# Altium PCB Lab11.PcbDoc
Units mil, origin at the board's own origin, x right, y up, seen from the top; angles counter-clockwise.
Board outline 15019.69 x 12106.3 mil, 2 copper layers (Top Layer, Top, Bottom Layer, Bottom); 28 components, 19 nets, 56 pads, 0 vias.
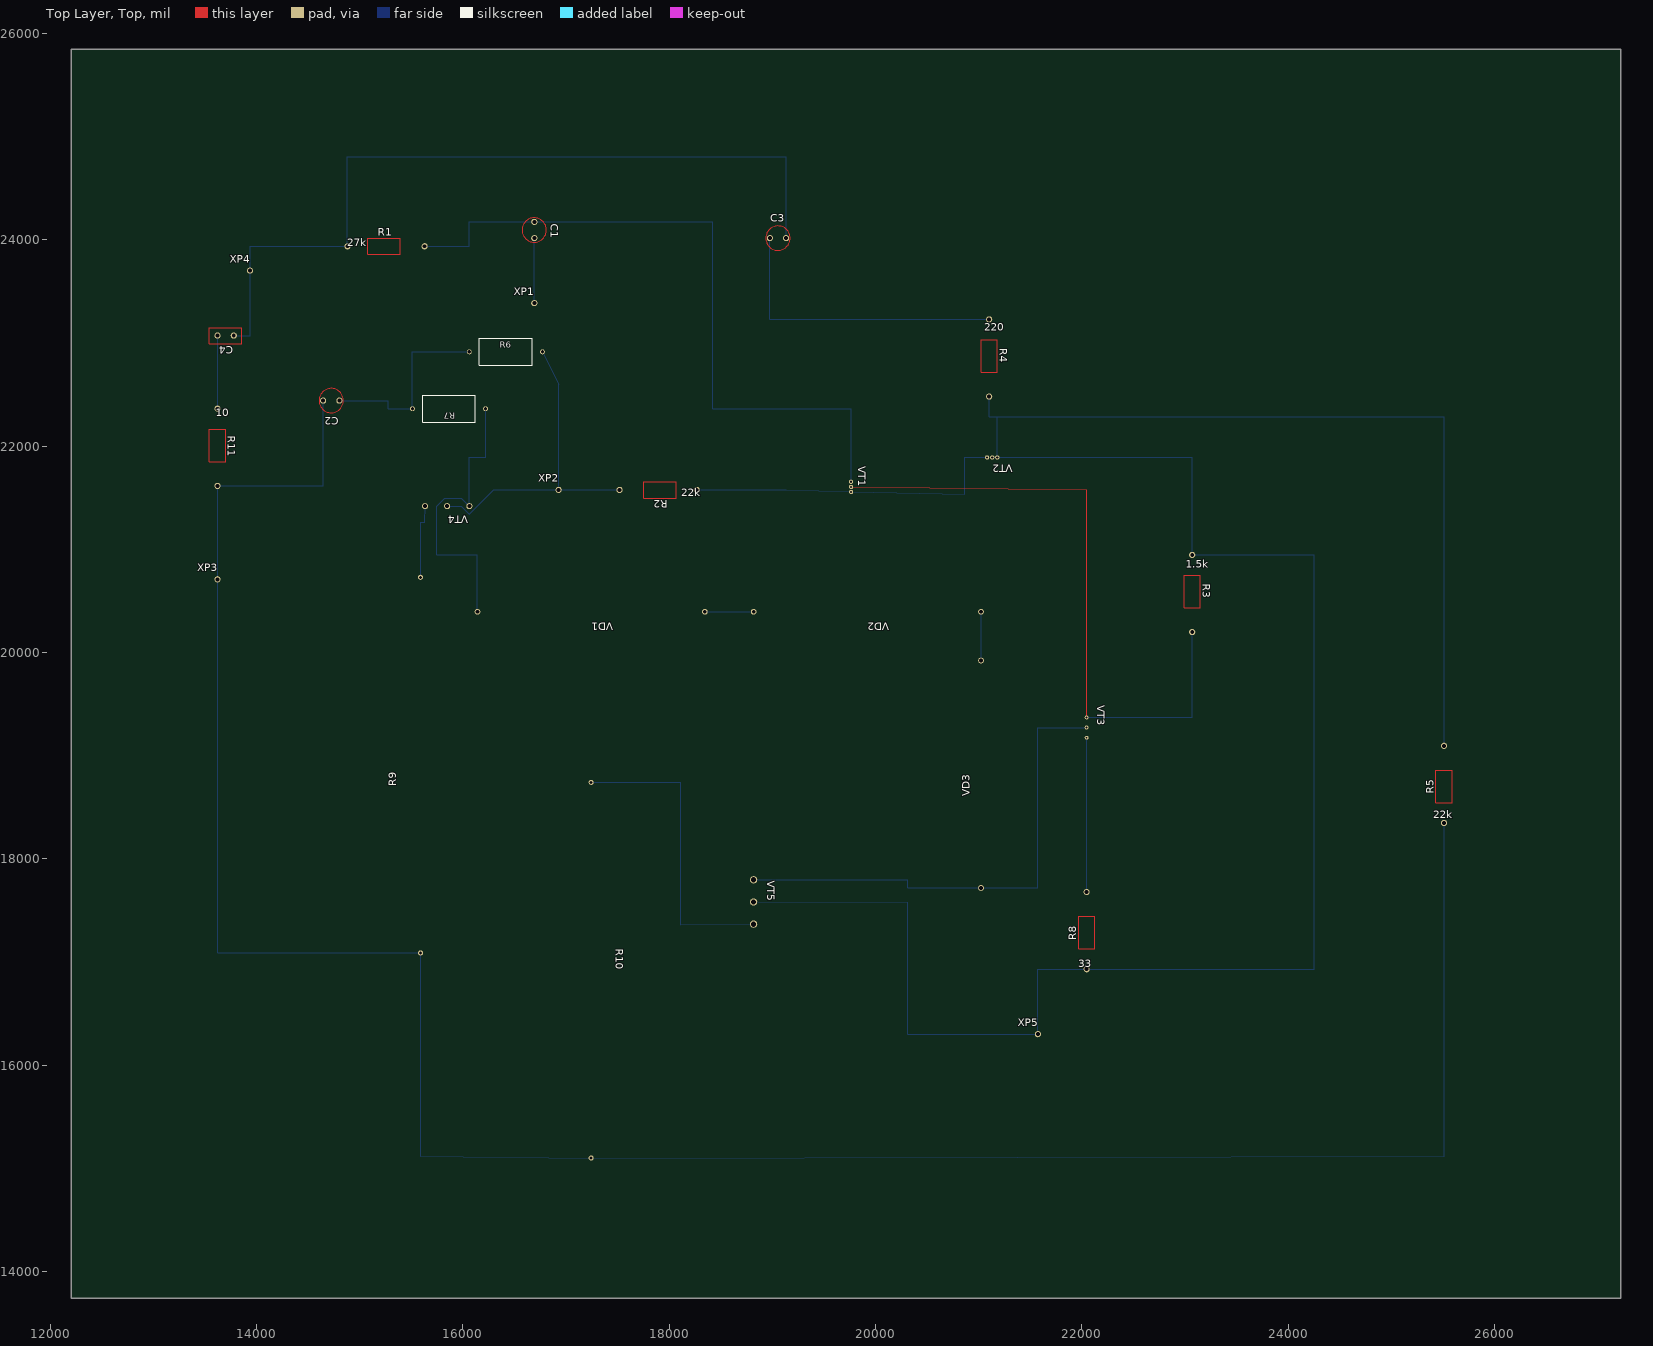
[diagram p0: Top Layer, Top view]
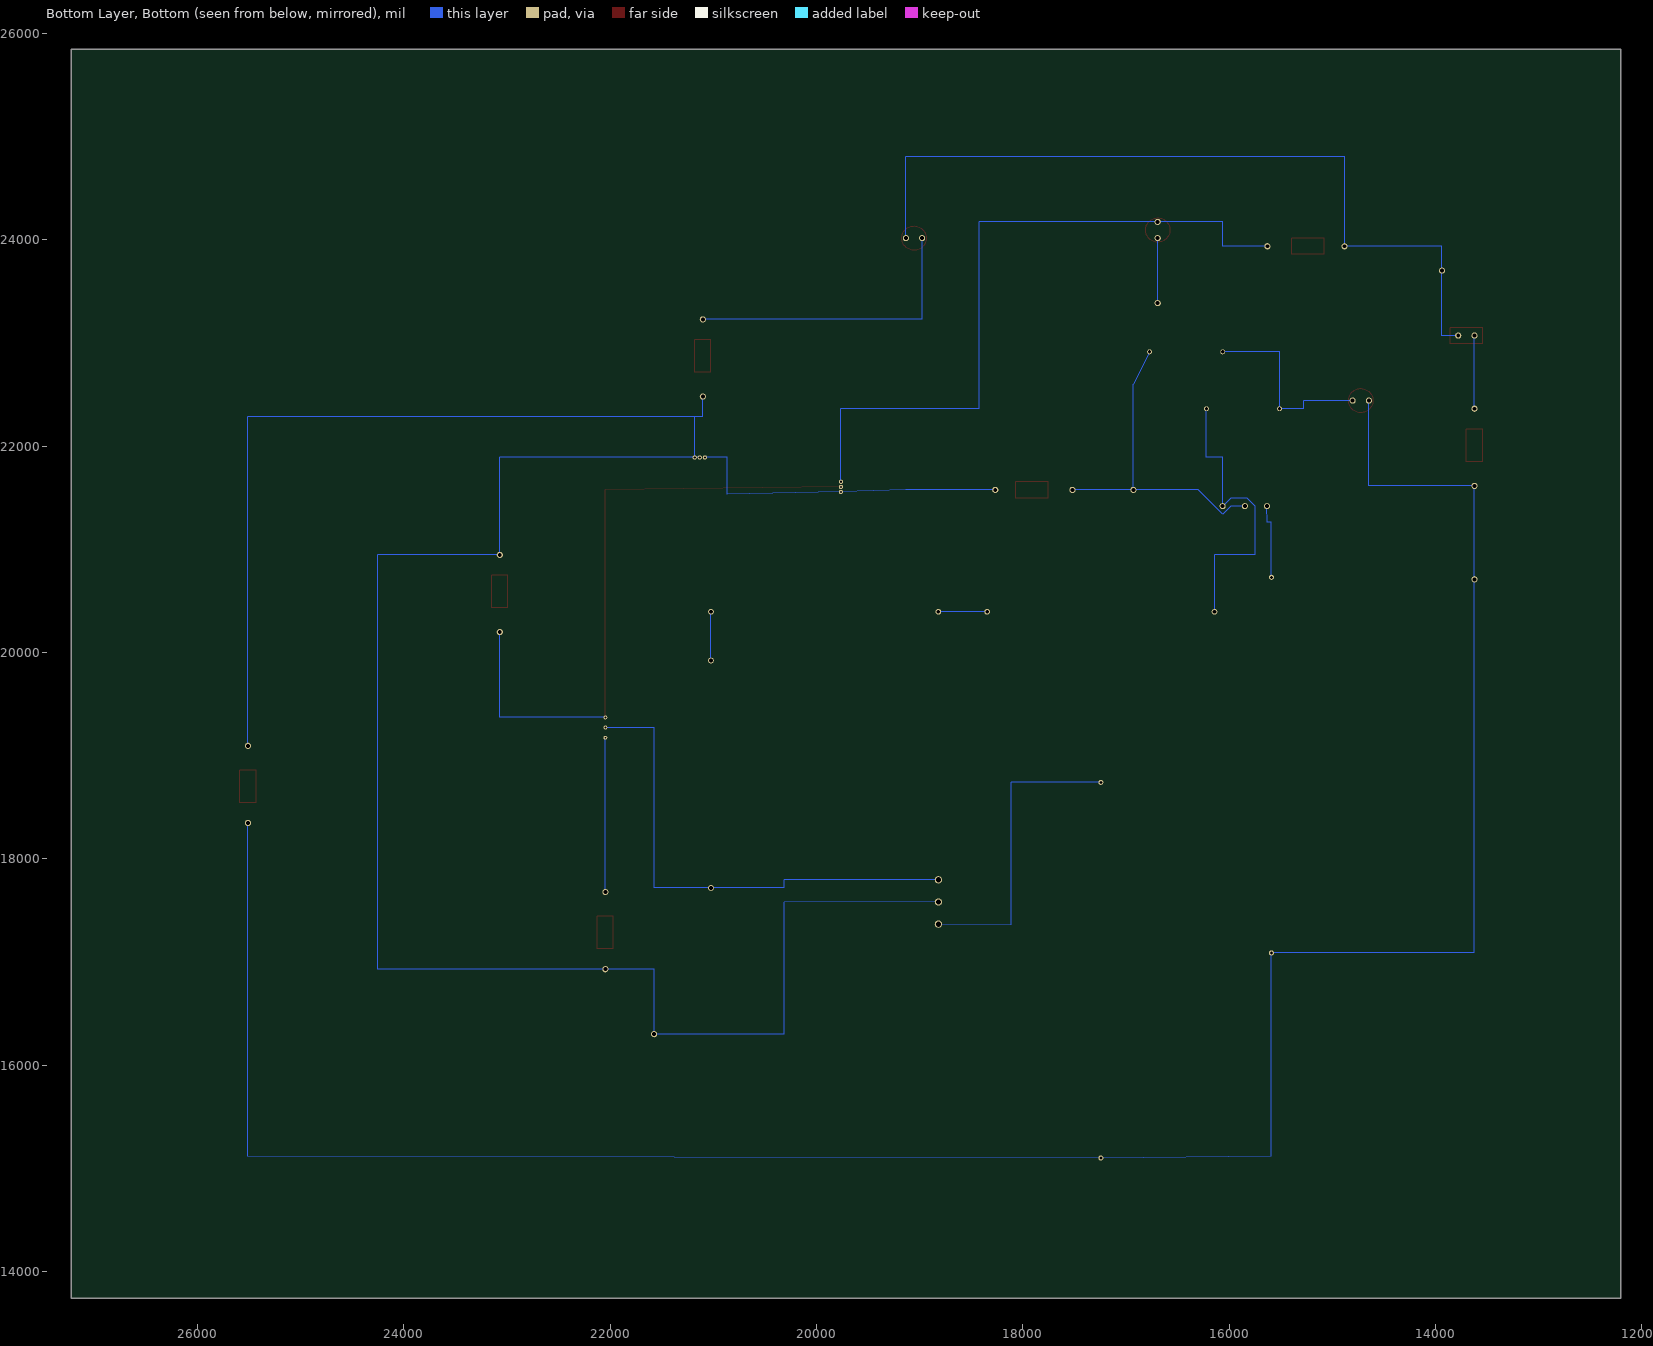
[diagram p1: Bottom Layer, Bottom view, seen from below]

## Layer stack, top to bottom
Top Solder, Top Mask: solder mask 0.4, Solder Resist, Dk 3.5
Top Layer, Top: signal copper 1.4
Dielectric 1: dielectric 12.6, FR-4, Dk 4.8
Bottom Layer, Bottom: signal copper 1.4
Bottom Solder, Bot Mask: solder mask 0.4, Solder Resist, Dk 3.5

## Board outline
12204.72,13740.16 27224.41,13740.16 27224.41,25846.46 12204.72,25846.46

## Design rules (kind name [scope] priority, off if disabled: settings)
Clearance [All] p1: gap=10 ignorepadtopadclearanceinfootprint=FALSE except(0: Arc-Hole Track-Hole SMDPad-Hole THPad-Hole Via-Hole Fill-Hole Poly-Hole Region-Hole Text-Hole; 11.81: Arc-Arc Arc-Track Arc-THPad Arc-Via Track-Track Track-THPad Track-Via THPad-THPad THPad-Via Via-Via)
PlaneClearance [All] p1: clearance=10
PolygonConnect [All] p1: connectstyle=Relief reliefconductorwidth=10 reliefentries=4 polygonreliefangle="90 Angle" airgapwidth=10
RoomDefinition [All] p1: confinementstyle=ConfineIn formatcopy=TRUE lockcomponents=FALSE outline 12204.72,13740.16 27224.41,13740.16 27224.41,25846.46 12204.72,25846.46
RoutingVias [All] p1: holewidth=28 width=50 viastyle="Through Hole" minholewidth=28 minwidth=50 maxholewidth=28 maxwidth=50
SolderMaskExpansion [All] p1: expansion=4 istentingtop=FALSE
Width [All] p1: maxlimit=10 minlimit=10 preferedwidth=10
29 further rules are at their usual default settings.

## Components (designator, comment, footprint, x,y, rotation, side; value= is the part's Value field where it differs from the comment)
C1 "10uF 25V" CAP2 16692.91,24173.23 r270 top
C2 "10uF 63V" CAP2 14803.15,22440.94 r180 top
C3 "100uF 50V" CAP2 18976.38,24015.75 r0 top
C4 "0.1" CAP1 13779.53,23070.87 r180 top
R1 "27k" RES 14881.89,23937.01 r0 top
R2 "22k" RES 18267.72,21574.8 r180 top
R3 "1.5k" RES 23070.87,20944.88 r270 top
R4 "220" RES 21102.36,23228.35 r270 top
R5 "22k" RES 25511.81,18346.46 r90 top
R6 "3.3k" МЛТ(1) 16062.99,22913.39 r0 top
R7 "3.3k" МЛТ(1) 16220.47,22362.2 r180 top
R8 "33" RES 22047.24,16929.13 r90 top
R9 "0.33" SQP5 15590.55,17086.61 r90 top
R10 "0.33" SQP5 17244.09,18740.16 r270 top
R11 "10" RES 13622.05,22362.2 r270 top
VD1 "{Value}" 1N4007 18346.46,20393.7 r180 top
VD2 "{Value}" 1N4007 21023.62,20393.7 r180 top
VD3 "{Value}" 1N4007 21023.62,17716.54 r90 top
VT1 "" BC558 19763.78,21653.54 r270 top
VT2 "" BC558 21181.1,21889.76 r180 top
VT3 "" TIP41 22047.24,19370.08 r270 top
VT4 "" TIP142 16062.99,21417.32 r180 top
VT5 "" TIP147 18818.9,17795.28 r270 top
XP1 "IN" PAD 16692.91,23385.83 r0 top
XP2 "+45V" PAD 16929.13,21574.8 r0 top
XP3 "OUT" PAD 13622.05,20708.66 r0 top
XP4 "OUT" PAD 13937.01,23700.79 r0 top
XP5 "-45V" PAD 21574.8,16299.21 r0 top

## Footprints (in the part's own frame and the unit in brackets; to place one, negate y for a bottom-side part, rotate by r counter-clockwise, add the part's x,y. Pads: shape width x height; smd on the part's side, far side on the other; paste and mask are expansions set on the pad)
1N4007 [mm]
  round 1.4 hole 0.9: 1(0,0) 2(56,0)
BC558 [mm]
  round 1.05 hole 0.55: 1(0,0) 2(1.25,0) 3(2.5,0)
CAP1 [mil]
  round 60 hole 38: 1(0,0) 2(157.48,0)
  Top Layer, Top lines w3.94: 236.22,78.74 -78.74,78.74 -78.74,-78.74 236.22,-78.74 236.22,78.74
CAP2 [mil]
  round 60 hole 38: 1(0,0) 2(157.48,0)
  Top Layer, Top circle w3.94: c78.74,0 r118.11
PAD [mil]
  round 60 hole 38: 1(0,0)
RES [mil]
  round 60 hole 38: 1(0,0) 2(748.03,0)
  Top Layer, Top lines w3.94: 196.85,-78.74 511.81,-78.74 511.81,78.74 196.85,78.74 196.85,-78.74
SQP5 [mm]
  round 1.25 hole 0.75: 1(0,0) 2(92.5,0)
TIP41 [mm]
  round 0.95 hole 0.45: 1(0,0) 2(2.5,0) 3(5,0)
TIP142 [mm]
  round 1.5 hole 1: 1(0,0) 2(5.45,0) 3(10.9,0)
TIP147 [mm]
  round 1.8 hole 1.3: 1(0,0) 2(5.45,0) 3(10.9,0)
МЛТ(1) [mm]
  round 1.2 hole 0.8: 1(0,0) 2(18,0)
  silkscreen extent 2.5,-3.3 15.5,3.3

## Nets (pads, with @x,y where several pads share a name; then routed paths per layer and width w, separated by ;. In a path a pad name is that pad's centre, name@x,y a point inside that pad or via, vN(x,y) a via of type N, cw(c..) or ccw(c..) an arc to the next point about the centre after c; other vN are vias at no path point)
1: C3.2 C4.1 R1.1 XP4.1 | length 7874
  Bottom Layer, Bottom w3.94: C4.1 13937.01,23070.87 XP4.1 13937.01,23937.01 R1.1 14881.89,24803.15 19133.86,24803.15 C3.2
NET00000: C1.2 XP1.1 | length 629.9
  Bottom Layer, Bottom w3.94: XP1.1 C1.2
NET00001: C1.1 R1.2 VT1.1 | length 6889.8
  Bottom Layer, Bottom w3.94: R1.2 16062.99,23937.01 16062.99,24173.23 C1.1 18425.2,24173.23 18425.2,22362.2 19763.78,22362.2 VT1.1
NET00002: R2.1 VT1.3 VT2.3 | length 3169.8
  Bottom Layer, Bottom w3.94: R2.1 19133.86,21574.8 VT1.3 20866.14,21535.43 20866.14,21889.76 VT2.3
NET00005: R4.2 R5.2 VT2.1 | length 8189
  Bottom Layer, Bottom w3.94: R4.2 21102.36,22283.46 21181.1,22283.46 ; VT2.1 21181.1,22283.46 ; R5.2 25511.81,22283.46 21181.1,22283.46
NET00006: C2.2 R5.1 R9.1 R10.2 R11.2 XP3.1 | length 23464.7
  Bottom Layer, Bottom w3.94: C2.2 14645.67,21614.17 R11.2 XP3.1 13622.05,17086.61 R9.1 15590.55,15118.11 R10.2 25511.81,15118.11 R5.1
NET00007: C2.1 R6.1 R7.2 | length 1889.8
  Bottom Layer, Bottom w3.94: C2.1 15275.59,22440.94 15275.59,22362.2 R7.2 15511.81,22913.39 R6.1
NET00008: C3.1 R4.1 | length 2913.4
  Bottom Layer, Bottom w3.94: C3.1 18976.38,23228.35 R4.1
NET00010: R3.2 VT1.2 VT3.1 | length 6338.8
  Top Layer, Top w3.94: VT1.2 22047.24,21574.8 VT3.1
  Bottom Layer, Bottom w3.94: VT3.1 23070.87,19370.08 R3.2
NET00011: R8.2 VT3.3 | length 1496.1
  Bottom Layer, Bottom w3.94: R8.2 VT3.3
NET00013: VD2.1 VD3.2 | length 472.4
  Bottom Layer, Bottom w3.94: VD3.2 VD2.1
NET00014: VD1.1 VD2.2 | length 472.4
  Bottom Layer, Bottom w3.94: VD1.1 VD2.2
NET00016: R7.1 VD1.2 VT4.1 | length 2899.9
  Bottom Layer, Bottom w3.94: VD1.2 16141.73,20944.88 15748.03,20944.88 15748.03,21417.32 15826.77,21496.06 15984.25,21496.06 VT4.1 16062.99,21889.76 16220.47,21889.76 R7.1
NET00018: R2.2 R6.2 VT4.2 XP2.1 | length 3177.5
  Bottom Layer, Bottom w3.94: VT4.2 15984.25,21417.32 16062.99,21338.58 16299.21,21574.8 XP2.1 ; R6.2 16929.13,22598.43 XP2.1 ; R2.2 XP2.1
NET00019: R9.2 VT4.3 | length 728.4
  Bottom Layer, Bottom w3.94: R9.2 15590.55,21259.84 15629.92,21259.84 VT4.3
NET00020: R10.1 VT5.3 | length 2952.8
  Bottom Layer, Bottom w3.94: R10.1 18110.24,18740.16 18110.24,17362.2 VT5.3
NET00021: VD3.1 VT3.2 VT5.1 | length 4862.2
  Bottom Layer, Bottom w3.94: VT5.1 20314.96,17795.28 20314.96,17716.54 VD3.1 21574.8,17716.54 21574.8,19271.65 VT3.2
NET00022: C4.2 R11.1 | length 708.7
  Bottom Layer, Bottom w3.94: R11.1 13622.05,22755.91 C4.2
NET00023: R3.1 R8.1 VT2.2 VT5.2 XP5.1 | length 15423.2
  Bottom Layer, Bottom w3.94: VT5.2 20314.96,17578.74 20314.96,16299.21 XP5.1 21574.8,16929.13 R8.1 24251.97,16929.13 24251.97,20944.88 R3.1 23070.87,21889.76 VT2.2